# Altium PCB Stingray.pcbdoc (part 1 of 2)
Units mil, origin at the board's own origin, x right, y up, seen from the top; angles counter-clockwise.
Board outline 6200 x 5620 mil, 2 copper layers (Top Layer, Bottom Layer); 126 components, 151 nets, 467 pads, 226 vias.
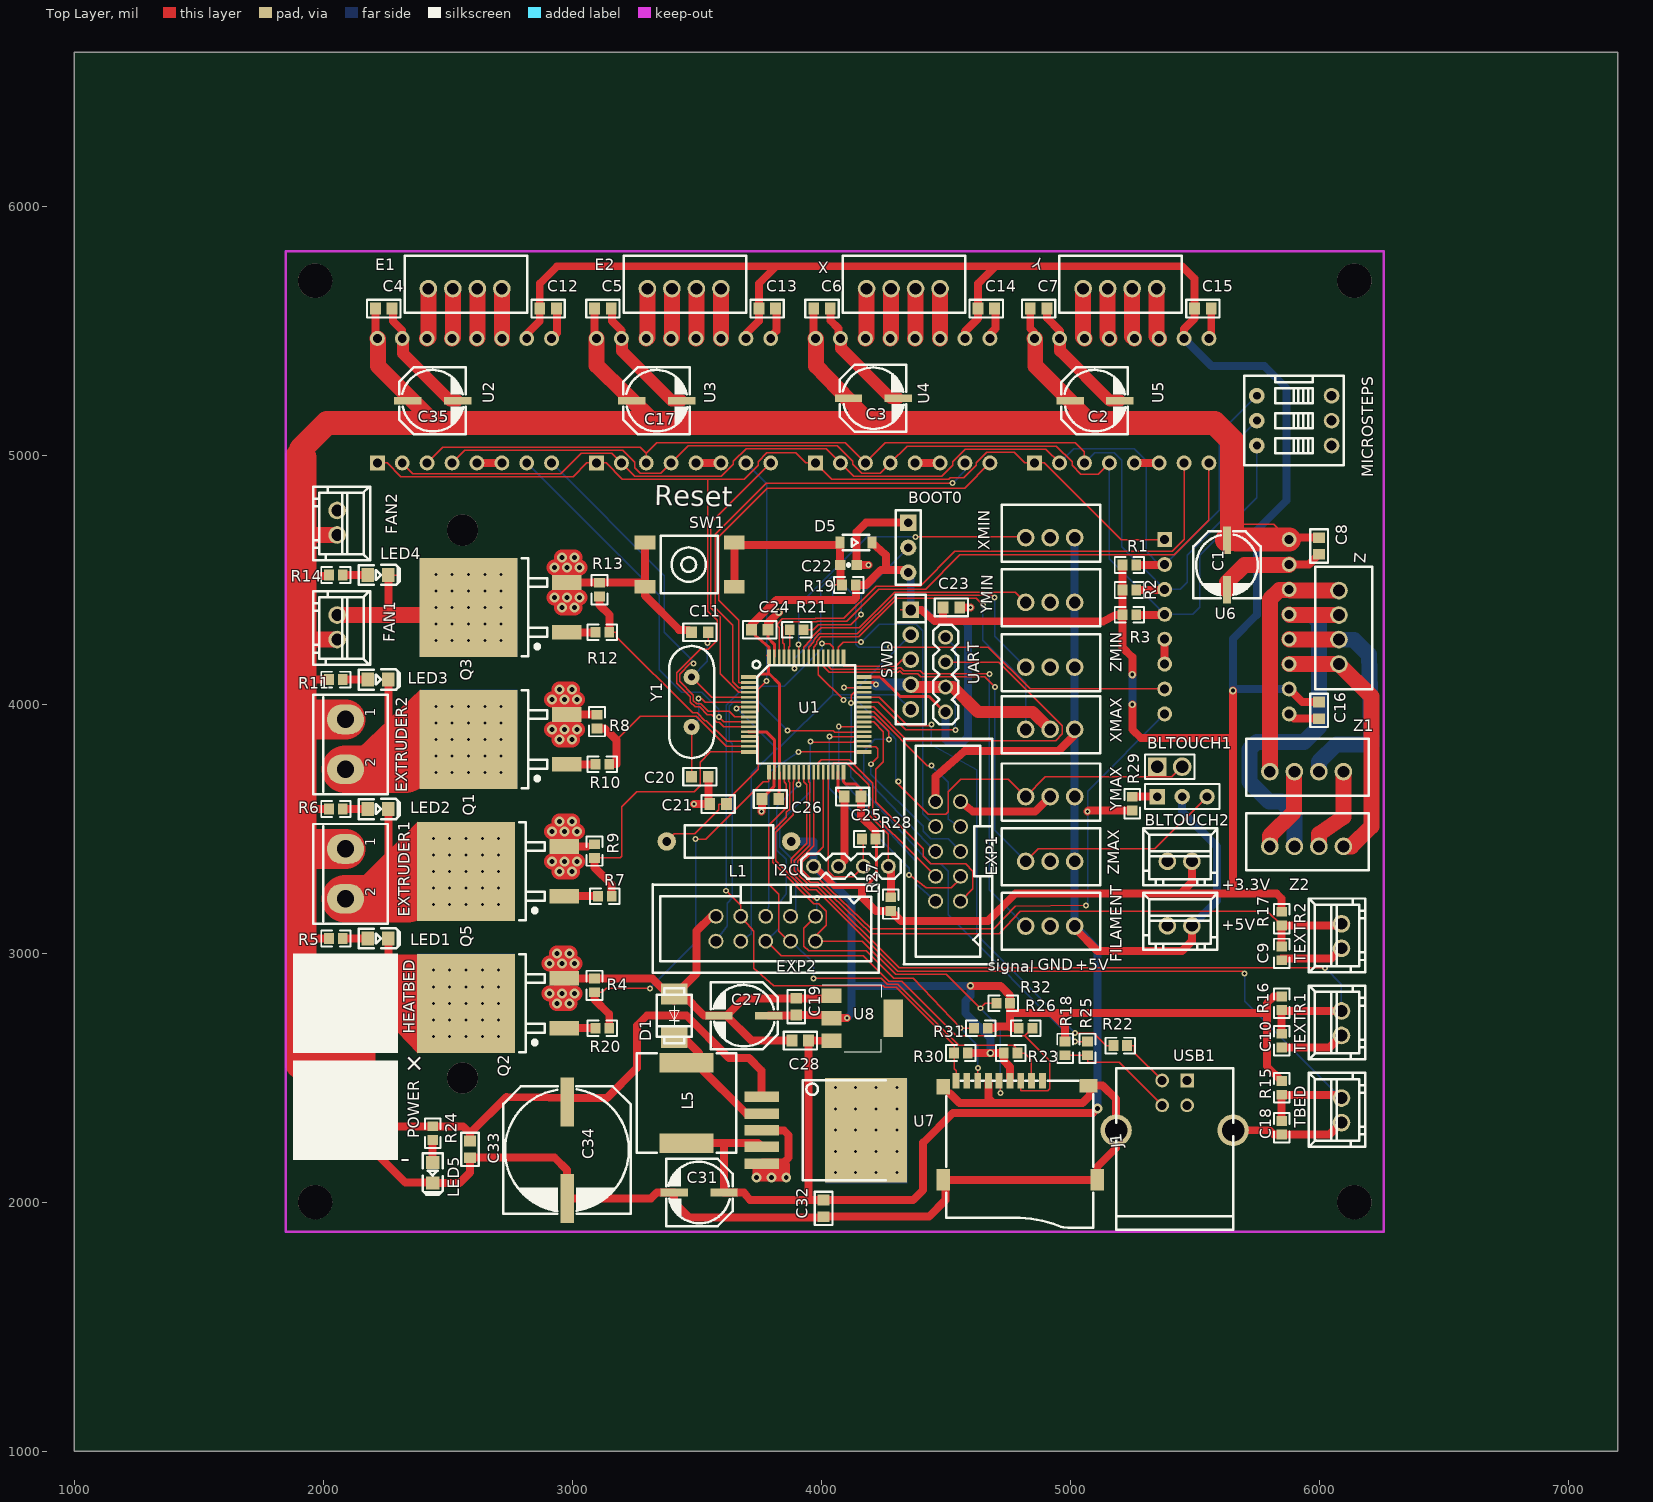
[diagram p0: Top Layer view]
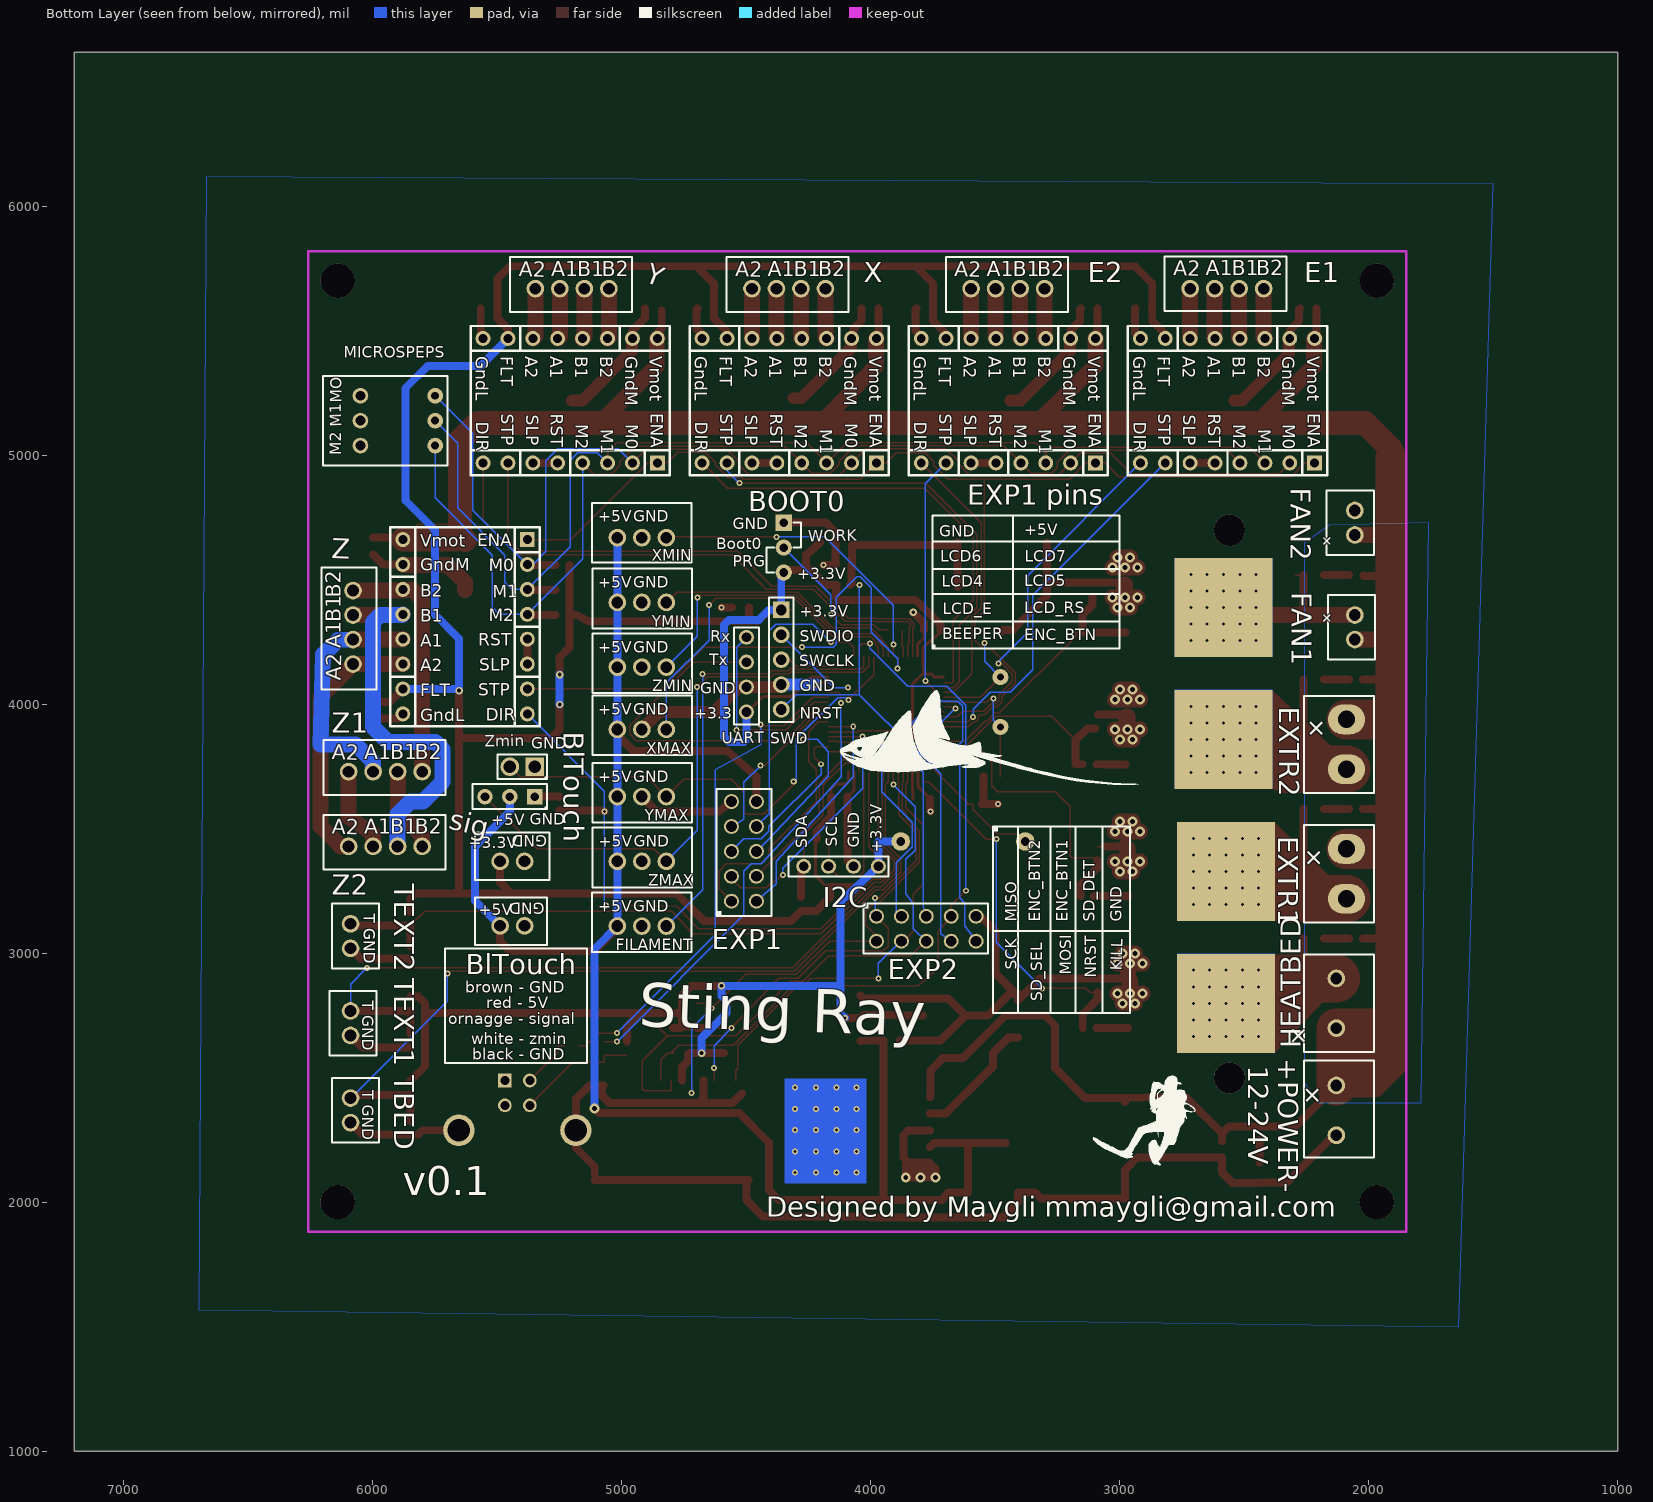
[diagram p1: Bottom Layer view, seen from below]

## Layer stack, top to bottom
Top Layer: signal copper (thickness not stored)
Dielectric: dielectric 12.6, FR-4, Dk 4.8
Bottom Layer: signal copper (thickness not stored)

## Board outline
7200,1000 1000,1000 1000,6620 7200,6620

## Components (designator, comment, footprint, x,y, rotation, side; value= is the part's Value field where it differs from the comment)
+3.3V "XH-2A black RHOS" XH-2A 5440,3370 r0 top
+5V "XH-2A black RHOS" XH-2A 5440,3111 r0 top
BLTOUCH1 "Header-Male-2.54_1x3" HDR-3X1/2.54 5450,3630 r0 top
BLTOUCH2 "Header-Male-2.54_1x2" HDR-2X1/2.54 5400,3750 r90 top
BOOT0 "BOOT0" H3-2.54 4350,4630 r0 top
C1 "100uF" CAP-D6.3XH7.7 5630,4560 r90 top
C2 "100uF" CAP-D6.3XH7.7 5100,5220 r180 top
C3 "100uF" CAP-D6.3XH7.7 4210,5230 r180 top
C4 "100nF" C0603#1 2210,5590 r0 top
C5 "100nF" C0603#1 3090,5590 r0 top
C6 "100nF" C0603#1 3970,5590 r0 top
C7 "100nF" C0603#1 4840,5590 r0 top
C8 "100nF" C0603#1 6000,4670 r270 top
C9 "10uF" 0603#1 5850,3000 r90 top
C10 "10uF" 0603#1 5850,2650 r90 top
C11 "22pF" C0603#1 3546.9,4290 r180 top
C12 "100nF" C0603#1 2870,5590 r0 top
C13 "100nF" C0603#1 3750,5590 r0 top
C14 "100nF" C0603#1 4630,5590 r0 top
C15 "100nF" C0603#1 5500,5590 r0 top
C16 "100nF" C0603#1 6000,4010 r270 top
C17 "100uF" CAP-D6.3XH7.7 3340,5220 r180 top
C18 "10uF" 0603#1 5850,2300 r90 top
C19 "100nF" C0603#1 3900,2820 r270 top
C20 "22pF" C0603#1 3480,3710 r0 top
C21 "100nF" C0603#1 3620,3600 r180 top
C22 "10UF-6.3V-20%(0603)" 0603-CAP 4110,4560 r180 top
C23 "100nF" C0603#1 4490,4390 r0 top
C24 "100nF" C0603#1 3720,4300 r0 top
C25 "100nF" C0603#2 4160,3630 r180 top
C26 "100nF" C0603#2 3830,3620 r180 top
C27 "100uF" CAP-D6.3XH5.5 3690,2750 r0 top
C28 "100nF" C0603#1 3950,2650 r180 top
C31 "220uF" CAP-D6.3XH5.5 3510,2040 r0 top
C32 "100nF" C0603#1 4010,2010 r270 top
C33 "100nF" C0603#2 2590,2180 r90 top
C34 "470uF" CAP-D12.5XH13.5 2980,2210 r90 top
C35 "100uF" CAP-D6.3XH7.7 2440,5220 r180 top
D1 "SS54" SMB(DO-214AA) 3410,2750 r270 top
D5 "1N4148W" SOD-123 4140,4650 r180 top
E1 "XH-4AK M" XH-4A 2570,5670 r0 top
E2 "XH-4AK M" XH-4A 3450,5670 r0 top
EXP1 "HDR-IDC-2.54-2X5P" HDR-IDC-2.54-2X5P 4510,3410 r90 top
EXP2 "HDR-IDC-2.54-2X5P" HDR-IDC-2.54-2X5P 3777.6,3099.3 r180 top
EXTRUDER1 "KF301-2P" KF301-2P 1960,3520 r270 top
EXTRUDER2 "KF301-2P" KF301-2P 1960,4040 r270 top
FAN1 "XH-2A black RHOS" XH-2A 2056.35,4310 r270 top
FAN2 "XH-2A black RHOS" XH-2A 2056.35,4730 r270 top
FILAMENT "XH-3A" XH-3A 4920,3110 r0 top
HEATBED "KF129-5.08" KF129-5.08 2300,2600 r180 top
I2C "Header-Male-2.54_1x4" 210S-1X4P 4120,3350 r0 top
J1 "Micro SD Card Holder;" MICRO-SD9+4P-SMD-16.1X14.5X1.85MM 4800,2290 r270 top
L1 "100uH" AXIAL-0.5 3630,3450 r180 top
L5 "47uH" SMD-10.0X10.0-10A50 3460,2400 r270 top
LED1 "Hotbead" LED-0805 2220,3060 r180 top
LED2 "Extruder1" LED-0805 2220,3580 r180 top
LED3 "Extruder2" LED-0805 2220,4100 r180 top
LED4 "Fan" LED-0805 2220,4520 r180 top
LED5 "Power" LED-0805 2440,2120 r90 top
MICROSTEPS "DIP switch,Dip Switch,DSWB03LHGET" DSWB03LHGET 5900,5140 r270 top
POWER "KF129-5.08" KF129-5.08 2300,2170 r180 top
Q1 "IRL3803S" TO-263-2-COLD 2983,3765 r90 top
Q2 "IRL3803S" TO-263-2-COLD 2973,2705 r90 top
Q3 "IRL3803S" TO-263-2-COLD 2983,4295 r90 top
Q5 "IRL3803S" TO-263-2-COLD 2973,3235 r90 top
R1 "10KΩ" 0603#2 5270,4560 r180 top
R2 "10KΩ" 0603#2 5270,4460 r180 top
R3 "10KΩ" 0603#2 5270,4360 r180 top
R4 "100K" 0603#2 3090,2840 r90 top
R5 "3.3K" 0603#2 2020,3060 r0 top
R6 "3.3K" 0603#2 2020,3580 r0 top
R7 "10" 0603#2 3100,3230 r0 top
R8 "100K" 0603#2 3100,3900 r90 top
R9 "100K" 0603#2 3090,3380 r90 top
R10 "10" 0603#2 3090,3760 r0 top
R11 "3.3K" 0603#2 2020,4100 r0 top
R12 "10" 0603#2 3090,4290 r0 top
R13 "100K" 0603#2 3110,4430 r90 top
R14 "3.3K" 0603#2 2020,4520 r0 top
R15 "3KΩ" 0603#1 5850,2460 r90 top
R16 "3KΩ" 0603#1 5850,2800 r90 top
R17 "3KΩ" 0603#1 5850,3140 r90 top
R18 "22" 0603#2 5070,2650 r270 top
R19 "10KΩ" 0603#2 4080,4480 r0 top
R20 "10" 0603#2 3090,2700 r0 top
R21 "10KΩ" 0603#2 3870,4300 r0 top
R22 "22" 0603#2 5170,2630 r0 top
R23 "47K" 0603#2 4730,2600 r0 top
R24 "3.3K" 0603#2 2440,2310 r270 top
R25 "1.5K" 0603#2 4980,2650 r270 top
R26 "47K" 0603#2 4790,2700 r0 top
R27 "4.7K" 0603#2 4280,3230 r270 top
R28 "4.7K" 0603#2 4160,3460 r0 top
R29 "10KΩ" 0603#2 5250,3570 r90 top
R30 "47K" 0603#2 4530,2600 r0 top
R31 "47K" 0603#2 4610,2700 r0 top
R32 "47K" 0603#2 4700,2800 r0 top
SW1 "Up" KEY-6.0*6.0 3470,4560 r0 top
SWD "Header-Male-2.54_1x5" DIP-1X5P-2.54MM-M 4360,4180 r270 top
TBED "XH-2A black RHOS" XH-2A 6090,2370 r90 top
TEXTR1 "XH-2A black RHOS" XH-2A 6090,2720 r90 top
TEXTR2 "XH-2A black RHOS" XH-2A 6090,3070 r90 top
U1 "STM32F103RCT6" LQFP64-0.5-10X10MM 3940,3960 r0 top
U2 "DRV8825" DRV8825 2220,4970 r90 top
U3 "DRV8825" DRV8825 3100,4970 r90 top
U4 "DRV8825" DRV8825 3980,4970 r90 top
U5 "DRV8825" DRV8825 4860,4970 r90 top
U6 "DRV8825" DRV8825 5380,4660 r0 top
U7 "LM2596R-5.0" TO-263-5-COLD 3780,2289.9 r180 top
U8 "AMS1117-3.3" SOT-223 4290,2740 r0 top
UART "Header-Male-2.54_1x4" 210S-1X4P 4500,4120 r90 top
USB1 "USB-B-Female-TH_C46393" USB-M-49 5420,2390 r0 top
X "XH-4AK M" XH-4A 4330,5670 r0 top
XMAX "XH-3A" XH-3A 4920,3900 r0 top
XMIN "XH-3A" XH-3A 4920,4670 r0 top
Y "XH-4AK M" XH-4A 5200,5670 r0 top
Y1 "49S8M" HC49US 3480,4010 r90 top
YMAX "XH-3A" XH-3A 4920,3630 r0 top
YMIN "XH-3A" XH-3A 4920,4410 r0 top
Z "XH-4AK M" XH-4A 6080,4310 r270 top
Z1 "XH-4AK M" XH-4A 5950,3730 r0 top
Z2 "XH-4AK M" XH-4A 5950,3430 r0 top
ZMAX "XH-3A" XH-3A 4920,3370 r0 top
ZMIN "XH-3A" XH-3A 4920,4150 r0 top
? "" IMAGE 2902.24,2329.31 r0 top
? "" IMAGE 3524.2,3867.23 r0 top

## Footprints (in the part's own frame and the unit in brackets; to place one, negate y for a bottom-side part, rotate by r counter-clockwise, add the part's x,y. Pads: shape width x height; smd on the part's side, far side on the other; paste and mask are expansions set on the pad)
210S-1X4P [mil]
  round 60 hole 39.37: 1(-150,0) 2(-50,0) 3(50,0) 4(150,0)
  silkscreen extent -200,-50 200,50
0603#1 [mm]
  rect 1x1.1 smd: 1(-0.7,0) 2(0.7,0)
  silkscreen extent -1.5,-0.8 1.5,0.8
0603#2 [mm]
  rect 1x1.1 smd: 1(0.1,0) 2(1.5,0)
  silkscreen extent -0.7,-0.8 2.3,0.8
0603-CAP [mil]
  rect 43.3x39.4 smd: 1(-32.95,0) 2(33.05,0)
  silkscreen extent 0,-1 0,1
AXIAL-0.5 [mil]
  round 74 hole 35.4: 1(-250,0) 2(250,0)
  silkscreen extent -177,-65 177,65
C0603#1 [mil]
  rect 43.3x47.2 smd: 1(0.05,0) 2(66.95,0)
  silkscreen extent -34,-35 100,35
C0603#2 [mil]
  rect 43.3x47.2 smd: 1(-0.05,0) 2(66.85,0)
  silkscreen extent -34,-35 100,35
CAP-D6.3XH5.5 [mm]
  rect 2.8x0.8 smd: 1(2.54,0) 2(-2.54,0)
  silkscreen extent -3.37,-3.43 3.43,3.43
CAP-D6.3XH7.7 [mm]
  rect 2.8x0.8 smd: 1(2.54,0) 2(-2.54,0)
  silkscreen extent -3.37,-3.43 3.43,3.43
CAP-D12.5XH13.5 [mm]
  rect 5x1.4 smd: 1(4.928,0) 2(-4.928,0)
  silkscreen extent -6.5,-6.5 6.5,6.5
DIP-1X5P-2.54MM-M [mm]
  rect 1.7x1.7 hole 1.1: 1(-5.08,0)
  round 1.7 hole 1.1: 2(-2.54,0) 3(0,0) 4(2.54,0) 5(5.08,0)
  silkscreen extent -6.6,-1.52 6.6,1.52
DRV8825 [mil]
  rect 60x60 hole 36: 1(0.1,2.2)
  round 60 hole 36: 2(0.08,-97.76) 3(0.08,-197.76) 4(0.08,-297.76) 5(0.08,-397.76) 6(0.08,-497.76) 7(0.08,-597.76) 8(0.08,-697.76) 9(500.08,-697.76) 10(500.08,-597.76) 11(500.08,-497.76) 12(500.08,-397.76) 13(500.08,-297.76) 14(500.08,-197.76) 15(500.08,-97.76) 16(500.08,2.24)
DSWB03LHGET [mm]
  round 1.6 hole 1: 1(-2.54,3.81) 2(0,3.81) 3(2.54,3.81)
  round 1.6 hole 0.813: 4(2.54,-3.81) 5(0,-3.81) 6(-2.54,-3.81)
  silkscreen extent -4.56,-5.11 4.57,5.05
H3-2.54 [mil]
  rect 65x65 hole 35: 1(0,100)
  round 65 hole 35: 2(0,0) 3(0,-100)
  silkscreen extent -50,-150 50,150
HC49US [mil]
  round 65 hole 27.6: 1(-100,0) 2(100,0)
  silkscreen extent -225,-90 225,90
HDR-2X1/2.54 [mm]
  rect 1.9x1.9 hole 1.3: 1(0,1.27)
  round 1.9 hole 1.3: 2(0,-1.27)
  silkscreen extent -1.27,-2.54 1.27,2.54
HDR-3X1/2.54 [mil]
  rect 62x62 hole 35: 1(-100,0)
  round 62 hole 35: 2(0,0) 3(100,0)
  silkscreen extent -150,-50 150,50
HDR-IDC-2.54-2X5P [mil]
  round 60 hole 43.3: 1(-200,-50) 2(-200,50) 3(-100,-50) 4(-100,50) 5(0,-50) 6(0,50) 7(100,-50) 8(100,50) 9(200,-50) 10(200,50)
  silkscreen extent -453,-178 453,177
IMAGE [mil]
KEY-6.0*6.0 [mm]
  rect 2.1x1.4 smd: 1(4.601,-2.201) 2(-4.502,-2.201) 3(4.604,2.303) 4(-4.502,2.301)
  silkscreen extent -2.9,-2.9 2.9,3
KF129-5.08 [mm]
  round 1.8 hole 1.2: 1(4.3,-2.54) 2(4.3,-7.62)
  silkscreen extent 0,-10.16 10.67,0
KF301-2P [mil]
  oval 120x150 hole 70: 1(100,130) 2(300,130)
  silkscreen extent 0,0 400,300
LED-0805 [mil]
  rect 51.2x55.1 smd: 1(40.7,0.05) 2(-42,0.05)
  silkscreen extent -88,-41 78,40
LQFP64-0.5-10X10MM [mil]
  rect 59.1x15.7 smd: 1(-231.95,149.95) 16(-231.95,-150.05) 33(232.05,-150.05) 48(232.05,149.95)
  rect 59.1x11 smd: 2(-231.95,128) 3(-231.95,108) 4(-231.95,89) 5(-231.95,69) 6(-231.95,49) 7(-231.95,30) 8(-231.95,10) 9(-231.95,-10) 10(-231.95,-30) 11(-231.95,-49) 12(-231.95,-69) 13(-231.95,-89) 14(-231.95,-108) 15(-231.95,-128) 34(232.05,-128) 35(232.05,-108) 36(232.05,-89) 37(232.05,-69) 38(232.05,-49) 39(232.05,-30) 40(232.05,-10) 41(232.05,10) 42(232.05,30) 43(232.05,49) 44(232.05,69) 45(232.05,89) 46(232.05,108) 47(232.05,128)
  rect 15.7x59.1 smd: 17(-149.95,-232.05) 32(150.05,-232.05) 49(150.05,231.95) 64(-149.95,231.95)
  rect 11x59.1 smd: 18(-128,-232.05) 19(-108,-232.05) 20(-89,-232.05) 21(-69,-232.05) 22(-49,-232.05) 23(-30,-232.05) 24(-10,-232.05) 25(10,-232.05) 26(30,-232.05) 27(49,-232.05) 28(69,-232.05) 29(89,-232.05) 30(108,-232.05) 31(128,-232.05) 50(128,231.95) 51(108,231.95) 52(89,231.95) 53(69,231.95) 54(49,231.95) 55(30,231.95) 56(10,231.95) 57(-10,231.95) 58(-30,231.95) 59(-49,231.95) 60(-69,231.95) 61(-89,231.95) 62(-108,231.95) 63(-128,231.95)
  silkscreen extent -215,-197 197,215
MICRO-SD9+4P-SMD-16.1X14.5X1.85MM [mil]
  rect 63x27.6 smd: 1(-199,89) 2(-199,45) 3(-199,2) 4(-199,-41) 5(-199,-85) 6(-199,-128) 7(-199,-171) 8(-199,-215) 9(-199,-258)
  rect 63x55.1 smd: G1(-175,-308.95)
  rect 86.6x55.1 smd: G2(199,-308.95) G3(199,309.05)
  rect 55.1x70.9 smd: G4(-178.95,274.05)
  silkscreen extent -199,-298 392,293
SMB(DO-214AA) [mil]
  rect 85x108 smd: 1(-87,0) 2(87,0)
  silkscreen extent -110,-70 110,70
SMD-10.0X10.0-10A50 [mm]
  rect 2x5.5 smd: 1(-4.1,0) 2(4.1,0)
  silkscreen extent -5.08,-5.08 5.08,5.08
SOD-123 [mil]
  rect 35.8x48 smd: 1(64,0) 2(-64,0)
  silkscreen extent -53,-31 53,31
SOT-223 [mm]
  rect 2x1.5 smd: 1(-6.3,2.3) 2(-6.3,0) 3(-6.3,-2.3)
  rect 2x3.8 smd: 4(0,0)
  silkscreen extent -7.25,-3.41 -1.24,3.41
TO-263-2-COLD [mm]
  rect 1.5x3 smd: 1(-0.127,0.127) 3(4.953,0.127)
  rect 10.1x10 smd: 4(2.413,10.126)
  rect 10.1x10 smd far side: 4(2.413,10.126)
  silkscreen extent -2.59,2.13 7.41,4.73
TO-263-5-COLD [mil]
  rect 137.79x42.1 smd: 1(18,-134) 2(18,-67) 3(18,0) 4(18,67) 5(18,134)
  rect 329.92x419.68 smd: 3(-400,0)
  silkscreen extent -480,-200 -147,200
USB-M-49 [mm]
  round 3.2 hole 2.3: 0(-5.969,-2.54) 0(5.969,-2.54)
  rect 1.4x1.4 hole 0.92: 1(1.27,2.54)
  round 1.4 hole 0.92: 2(-1.27,2.54) 3(-1.27,0) 4(1.27,0)
  silkscreen extent -5.97,-12.7 5.97,3.81
XH-2A [mm]
  round 1.8 hole 1.199: 1(-1.251,0) 2(1.251,0)
  silkscreen extent -3.69,-2.45 3.83,3.35
XH-3A [mm]
  round 1.8 hole 1.199: 1(-2.501,0) 2(0.001,0) 3(2.501,0)
  silkscreen extent -4.91,-2.44 5.1,3.38
XH-4A [mm]
  round 1.8 hole 1.199: 1(-3.75,0) 2(-1.248,0) 3(1.251,0) 4(3.75,0)
  silkscreen extent -6.16,-2.44 6.33,3.38

## Free pads (board coordinates)
  round 137.8 hole 137.8 unplated: ""(1968.11,2001.11) ""(1968.11,5701.89) ""(6141.33,2001.11) ""(6141.33,5701.89)
  round 125.98 hole 125.98 unplated: ""(2560,2500) ""(2560,4700)

## Via types
v1: diameter 24.4, hole 12, Top Layer to Bottom Layer, 126 vias
v2: diameter 24, hole 12, Top Layer to Bottom Layer, 50 vias
v3: diameter 40, hole 20, Top Layer to Bottom Layer, 44 vias
v4: diameter 30, hole 15, Top Layer to Bottom Layer, 6 vias

## Nets (pads, with @x,y where several pads share a name; then routed paths per layer and width w, separated by ;. In a path a pad name is that pad's centre, name@x,y a point inside that pad or via, vN(x,y) a via of type N, cw(c..) or ccw(c..) an arc to the next point about the centre after c; other vN are vias at no path point)
3: 
  other v1: 4057,2119.9 4137.33,2119.9 4220.67,2119.9 4304,2119.9 4057,2205.15 4137.33,2205.15 4220.67,2205.15 4304,2205.15 4057,2290.4 4137.33,2290.4 4220.67,2290.4 4304,2290.4 4057,2375.65 4137.33,2375.65 4220.67,2375.65 4304,2375.65 4057,2460.9 4137.33,2460.9 4220.67,2460.9 4304,2460.9
+5V: +5V.2 BLTOUCH1.2 C28.1 C31.1 C32.1 EXP1.10 FILAMENT.3 L5.2 U7.4 U8.3 XMAX.3 XMIN.3 YMAX.3 YMIN.3 ZMAX.3 ZMIN.3 | length 7339.4
  Top Layer w6: C31.1@3610,2040 3642.1,2040 C31.1@3642.1,2050 ; C28.1@3949.95,2650 C28.1@3965.3,2650
  Top Layer w32: L5.2@3460,2238.58 3746.32,2238.58 U7.4@3762,2222.9 ; 3609.3,2220 3609.3,2040.7 C31.1@3610,2040 3690,2040 ; 3691,2038 3714.3,2009.9 4010,2009.9 4370,2009.9 4410,2050 4410,2240 4530,2360 5092.4,2360 v3(5109.5,2377.1) ; C28.1@3949.95,2650 3950,2012.7 3952.7,2009.9 ; C28.1@3965.3,2650 3980.7,2650 ; 3980,2650 U8.3@4041.3,2649.4 ; EXP1.10@4460,3610 4460,3710 4576.1,3813 4953,3813 5029.3,3889.2 XMAX.3@5018.5,3900 ; FILAMENT.3@5018.5,3110 5018.5,3101.5 5110,3010 5450,3010 5490,3050 5490,3110.2 +5V.2@5489.3,3111
  Bottom Layer w32: XMIN.3@5018.5,4670 5018.5,4410 5018.5,4150 5018.5,3900 5018.5,3630 5018.5,3370 5018.5,3110 5109.5,3018.9 v3(5109.5,2377.1) ; BLTOUCH1.2@5450,3630 5450,3570 5590,3430 5590,3211.7 +5V.2@5489.3,3111
BEEPER: EXP1.1 U1.39 | length 1051.4
  Top Layer w6: U1.39@4172.1,3930 4210.7,3930 4250,3890 4250,3770 4220,3740 4220,3610 4410,3420 4410,3390 4440,3360 4580,3360 4610,3330 4610,3260 EXP1.1@4560,3210
BTN_EN1: EXP2.5 U1.33 | length 988
  Top Layer w6: v2(3910,3810) 3910,3809.9 U1.33@4172.1,3809.9
  Bottom Layer w6: EXP2.5@3777.6,3149.3 3790,3190 3790,3727.9 v2(3910,3810)
BTN_EN2: EXP2.3 U1.35 | length 999
  Top Layer w6: v2(3957.3,3852) 3961.4,3847.9 4129.3,3847.9 4133.4,3852 U1.35@4172.1,3852
  Bottom Layer w6: EXP2.3@3898.8,3149.3 3898.8,3364.2 3833.8,3429.1 3833.8,3526.9 3957.3,3650.4 v2(3957.3,3852)
BTN_ENC: EXP1.2 U1.38 | length 958.5
  Top Layer w6: v2(4070.9,3911) 4133.4,3911 U1.38@4172.1,3911
  Bottom Layer w6: v2(4070.9,3911) 4070.9,3709.1 4380,3370.9 4380,3280 EXP1.2@4460,3210
E1_DIR: U1.9 U2.8 | length 1493.2
  Top Layer w6: v2(3488.1,4165.3) 3474.8,4165.3 3431.8,4122.3 3431.8,4093.2 3487.3,4037.7 3487.3,4014.9 3499.6,4002.5 3516.9,4002.5 3547.1,3972.4 3630.6,3972.4 3653,3950 U1.9@3708.1,3950
  Bottom Layer w6: U2.8@2917.76,4970.08 3370,4517.8 3370,4290 3488.1,4171.9 v2(3488.1,4165.3)
E1_STP: U1.10 U2.7 | length 1514.1
  Top Layer w6: v2(3589,3949.3) 3608.4,3930 U1.10@3708.1,3930
  Bottom Layer w6: U2.7@2817.76,4970.08 3350,4437.8 3350,4140 3440,4050 3520,4050 3589,3981 v2(3589,3949.3)
E2_DIR: U1.4 U3.8 | length 1105.6
  Top Layer w6: U1.4@3708.1,4049 3669.4,4049 3595.7,4122.7 3595.7,4350 3557.6,4388.1 3557.6,4729.9 U3.8@3797.76,4970.08
E2_STP: U1.8 U3.7 | length 1087.4
  Top Layer w6: U1.8@3708.1,3970 3746.7,3970 3746.7,4060.7 v2(3781,4095)
  Bottom Layer w6: U3.7@3697.76,4970.08 3781,4886.9 v2(3781,4095)
EXTRUDER1: R7.2 R9.1 U1.16 | length 1139.9
  Top Layer w6: 3090,3345.2 3090,3359.6 ; R9.1@3090,3383.9 3194,3383.9 3200,3390 3200,3590 3260,3650 3490,3650 3514,3674 3514,3769 3555,3809.9 U1.16@3708.1,3809.9
  Top Layer w32: 3090,3345.2 3159.1,3276.1 R7.2@3159.1,3230 ; 3090,3359.6 R9.1@3090,3373.9
EXTRUDER2: R8.1 R10.2 U1.15 | length 842.6
  Top Layer w6: 3177.8,3856.9 3273.3,3952.4 3498.4,3952.4 3618.8,3832 U1.15@3708.1,3832
  Top Layer w32: R8.1@3100,3903.9 3130.8,3903.9 3177.8,3856.9 3177.8,3760 R10.2@3149.1,3760
FAN1: R12.2 R13.1 U1.14 | length 911.3
  Top Layer w6: R12.2@3149.1,4290 3177.8,4290 3177.8,4272.9 3484.5,3966.1 3501.9,3966.1 3533.2,3934.8 3539.4,3934.8 3622.2,3852 3669.4,3852 U1.14@3708.1,3852
  Top Layer w32: R13.1@3110,4433.9 3110,4400 3150,4360 3150,4290.9 R12.2@3149.1,4290
FILAMENT: FILAMENT.1 U1.52 | length 1776.4
  Top Layer w6: U1.52@4029,4191.9 4029,4153.3 4041.4,4140.9 4304.1,4140.9 4310.2,4147 4320.2,4147 4332.5,4134.7 4399,4134.7 4411.1,4122.6 v2(4676.2,4122.6)
  Bottom Layer w6: v2(4676.2,4122.6) 4676.2,3255.3 FILAMENT.1@4821.55,3110
GND: +3.3V.1 +5V.1 BLTOUCH1.1 BLTOUCH2.1 BOOT0.1 C1.2 C2.2 C3.2 C4.2 C5.2 C6.2 C7.2 C8.2 C9.1 C10.1 C11.2 C12.2 C13.2 C14.2 C15.2 C16.2 C17.2 C18.1 C19.1 C20.2 C21.2 C22.1 C23.2 C24.2 C25.2 C26.2 C27.2 C28.2 C31.2 C32.2 C33.1 C34.2 C35.2 D1.1 EXP1.9 EXP2.9 FAN2.1 FILAMENT.2 I2C.2 J1.6 J1.G1 J1.G2 J1.G3 J1.G4 LED5.2 MICROSTEPS.1 MICROSTEPS.2 MICROSTEPS.3 POWER.1 Q1.3 Q2.3 Q3.3 Q5.3 R4.2 R8.2 R9.2 R13.2 R29.2 SW1.2 SW1.4 SWD.4 TBED.1 TEXTR1.1 TEXTR2.1 U1.12 U1.18 U1.31 U1.47 U1.63 U2.9 U2.15 U3.9 U3.15 U4.9 U4.15 U5.9 U5.15 U6.9 U6.15 U7.3 U7.5 U8.1 UART.2 USB1.0 USB1.4 XMAX.2 XMIN.2 YMAX.2 YMIN.2 ZMAX.2 ZMIN.2 | length 17177.2
  Top Layer w6: LED5.2@2439.95,2078 LED5.2@2440,2095.3 ; 2590,2149.2 C33.1@2590,2179.9 ; C12.2@2936.95,5590 C12.2@2952.3,5590 ; 3059.2,3429 3074.6,3429 3082.3,3429 R9.2@3090,3429 ; R8.2@3087.6,3959 R8.2@3100,3959.05 ; R13.2@3110,4489.05 R13.2@3120.8,4489 ; SW1.2@3292.8,4473.3 3318,4473.3 SW1.2@3330.6,4473.3 ; C31.2@3377.9,2050 3377.9,2040 C31.2@3410,2040 ; D1.1@3410,2811.2 D1.1@3410,2837 ; 3449.2,4290 C11.2@3479.95,4290 ; C21.2@3547,3600 C21.2@3553.1,3600 ; U7.5@3762,2155.9 U7.5@3801,2155.9 ; C26.2@3763.15,3620 C26.2@3771.2,3620 ; C24.2@3787,4283.6 C24.2@3786.95,4300 ; C13.2@3816.95,5590 C13.2@3832.3,5590 ; C19.1@3900,2819.9 C19.1@3907.8,2819.9 ; C25.2@4093.15,3630 C25.2@4093.2,3637.8 ; BOOT0.1@4350,4719.2 BOOT0.1@4350,4730 ; 4672,2448.4 J1.6@4672,2489 ; C7.2@4906.95,5590 C7.2@4922.3,5590 ; J1.G3@5109.1,2091 J1.G3@5109.1,2117.2 ; USB1.0@5185,2290 USB1.0@5185,2332.1
  Top Layer w12: U1.12@3708.1,3891 3709.1,3890 3780,3890 3812,3858 3812,3727.9 3810,3725.9 3810,3670 3763.2,3623.1 C26.2@3763.15,3620 ; C24.2@3787,4283.6 3787,4267.3 3812,4242.2 U1.63@3812,4191.9 ; U1.31@4068,3727.9 4068,3655.1 C25.2@4093.15,3630 ; U1.47@4172.1,4088 4212,4088 v1(4220,4080)
  Top Layer w32: POWER.1@2130.71,2270 2140,2270 2330,2080 2438,2080 LED5.2@2439.95,2078 2548,2078 2590,2120 C33.1@2590,2179.9 ; C4.2@2276.95,5590 2280,5586.9 2280,5540 2317.8,5502.2 U2.15@2317.76,5470.08 ; C33.1@2590,2179.95 2930.05,2179.95 2980,2130 C34.2@2980,2016 3316,2016 3340,2040 C31.2@3410,2040 3410,2000 3470,1940 4003.1,1940 C32.2@4010,1943.05 4433.1,1943 4500,2010 4500,2082 4491.1,2091 J1.G3@5109.1,2091 ; U2.9@2917.76,5470.08 2940,5492.3 2940,5590 C12.2@2936.95,5590 ; Q2.3@2968,2899.9 3058.3,2899.9 3059.2,2899 R4.2@3090,2899.05 3322.2,2899 D1.1@3410,2811.2 ; Q5.3@2968,3429.9 3058.3,3429.9 3059.2,3429 ; Q1.3@2978,3959.9 3068.3,3959.9 3069.2,3959 R8.2@3087.6,3959 ; Q3.3@2978,4489.9 3109.1,4489.9 R13.2@3110,4489.05 3277.1,4489 SW1.2@3292.8,4473.3 ; C5.2@3156.95,5590 3160,5586.9 3160,5540 3197.8,5502.2 U3.15@3197.76,5470.08 ; SW1.4@3292.75,4650.6 SW1.2@3292.8,4473.3 ; C11.2@3479.95,4290 3470,4300 3430,4300 3292.8,4437.2 SW1.2@3292.8,4473.3 ; v1(3490,3600) C21.2@3553.1,3600 ; C21.2@3547,3600 3547,3677.3 C20.2@3546.95,3710 ; EXP2.9@3577.6,3149.3 3560.7,3150.7 3500,3090 3500,2920 3417,2837 D1.1@3410,2837 3443,2837 3530,2750 C27.2@3590,2750 ; v1(3760,3570) 3763.2,3586.8 C26.2@3763.15,3620 ; U7.3@3762,2289.9 3850.1,2289.9 3870,2270 3870,2180 3850,2160 ; C24.2@3786.95,4300 3787,4326.9 v4(3830,4370) ; U3.9@3797.76,5470.08 3797.8,5477.8 3820,5500 3820,5586.9 C13.2@3816.95,5590 ; C28.2@3883.1,2650 3720,2650 C27.2@3620,2750 ; C6.2@4036.95,5590 4037,5543 4070,5510 4070,5477.8 U4.15@4077.76,5470.08 ; U8.1@4042,2830.5 4031.4,2819.9 3900,2819.9 C19.1@3900,2819.95 3690,2820 C27.2@3620,2750 ; I2C.2@4070,3350 4093.2,3373.2 C25.2@4093.15,3630 ; v1(4190,4560) C22.1@4142.95,4560 4143,4692.9 4180,4730 BOOT0.1@4350,4730 ; J1.G1@4518.2,2437.9 4556.1,2400 4690,2400 ; C23.2@4556.95,4390 v1(4600,4390) ; EXP1.9@4560,3610 4610,3570 4860,3570 YMAX.2@4920.1,3630 ; J1.6@4672,2489 4672,2418 4690,2400 ; U4.9@4677.76,5470.08 4677.8,5487.8 4700,5510 4700,5586.9 C14.2@4696.95,5590 ; C7.2@4906.95,5590 4907,5553 4960,5500 4960,5472.3 U5.15@4957.76,5470.08 ; J1.G3@5109.1,2117.2 5109.1,2143.4 5185,2219.3 USB1.0@5185,2290 5185,2415 5130,2470 5075.1,2470 5074.1,2468.9 5080,2463 5080,2430 5050,2400 4690,2400 ; R29.2@5250,3629.05 5251,3630 BLTOUCH1.1@5350,3630 ; U5.9@5557.76,5470.08 5567,5479.3 C15.2@5566.95,5590 ; USB1.0@5655,2290 5801.7,2290 5819.2,2272.4 C18.1@5850,2272.45 6041.7,2272.4 TBED.1@6090,2320.7 ; C10.1@5850,2622.45 6041.7,2622.4 TEXTR1.1@6090,2670.7 ; C9.1@5850,2972.45 5850,2980 6049.3,2980 TEXTR2.1@6090,3020.7 ; U6.9@5880.08,3962.24 5899.3,3943 5925.9,3943 C16.2@6000,3943.05 ; U6.15@5880.08,4562.24 5959.2,4562.2 C8.2@6000,4603.05 ; C27.2@3590,2750 C27.2@3620,2750 ; C27.2@3590,2750 C27.2@3620,2750 ; 3850,2160 3766.1,2160 U7.5@3762,2155.9 3740,2133.9 v3(3740,2100) v3(3800,2100) v3(3860,2100) 3860,2150 3850,2160
  Top Layer w48: U2.15@2317.76,5470.08 2320,5467.8 2320,5410 2510,5220 C35.2@2540,5220 ; U3.15@3197.76,5470.08 3200,5467.8 3200,5420 3400,5220 C17.2@3440,5220 ; U4.15@4077.76,5470.08 4080,5467.8 4080,5430 4280,5230 C3.2@4310,5230 ; SWD.4@4360,4080 4370,4070 UART.2@4500,4070 4530,4070 4630,3970 4850.1,3970 XMAX.2@4920.1,3900 ; U5.15@4957.76,5470.08 4960,5467.8 4960,5420 5160,5220 C2.2@5200,5220
  Top Layer w64: v3(2910,2840) v3(2960,2840) ; v3(2910,2960) v3(2960,2960) ; v3(2920,3370) v3(2970,3370) ; v3(2920,3490) v3(2970,3490) v3(3020,3490) ; v3(2920,3900) v3(2970,3900) ; v3(2920,4020) v3(2970,4020) v3(3020,4020) ; v3(2930,4430) v3(2980,4430) ; v3(2930,4550) v3(2980,4550) v3(3030,4550) ; v3(2940,2800) v3(2990,2800) ; v3(2940,3000) v3(2990,3000) ; v3(2950,3330) v3(3000,3330) ; v3(2950,3530) v3(3000,3530) ; v3(2950,3860) v3(3000,3860) ; v3(2950,4060) v3(3000,4060) ; v3(2960,4390) v3(3010,4390) ; v3(2960,4590) v3(3010,4590) ; Q5.3@2978,3429.9 2970,3422 v3(2970,3370) ; Q1.3@2978,3949.9 2970,3952 v3(2970,3900) ; Q3.3@2988,4479.9 2980,4482 v3(2980,4430) ; v3(3010,2840) v3(2960,2840) ; v3(3010,2960) v3(2960,2960) ; v3(3020,3370) v3(2970,3370) ; v3(3020,3900) v3(2970,3900) ; v3(3030,4430) v3(2980,4430) ; C1.2@5630,4460 5630,4490 5700,4560 5877.8,4560 U6.15@5880.08,4562.24 ; v3(2960,2840) 2960,2892 2968,2899.9 2968,2952 v3(2960,2960)
  Bottom Layer w48: v1(4220,4080) SWD.4@4360,4080
HEATBED: R4.1 R20.2 U1.17 | length 1500.3
  Top Layer w6: R4.1@3090,2843.9 3120.8,2843.9 3136.6,2859.7 v2(3311.9,2859.7) ; v2(3496.4,3459.1) 3537.3,3459.1 3767.6,3689.3 3790.1,3689.3 U1.17@3790.1,3727.9
  Top Layer w32: R4.1@3090,2843.9 3090,2815.2 3149.1,2756.1 R20.2@3149.1,2700
  Bottom Layer w6: v2(3311.9,2859.7) 3496.4,3044.2 v2(3496.4,3459.1)
J1_1: J1.1
J1_8: J1.8
KILL: EXP2.10 U1.37 | length 1573.6
  Top Layer w6: v2(3865.4,3894.9) 4048.2,3894.9 4054,3889.1 4131.5,3889.1 4133.4,3891 U1.37@4172.1,3891
  Bottom Layer w6: EXP2.10@3577.6,3049.3 3622.1,3111 3622.1,3202.1 3643.4,3223.5 3643.4,3841.3 3630.9,3853.9 3630.9,3992.2 3652.1,4013.5 3746.9,4013.5 v2(3865.4,3894.9)
L1_2: C21.1 L1.2 U1.13 | length 683.3
  Top Layer w6: L1.2@3380,3450 3410.2,3480.2 3492.5,3480.2 3589.2,3576.9 3589.2,3600 3604.6,3600 C21.1@3606.7,3600 ; C21.1@3619.95,3600 C21.1@3606.7,3600 ; U1.13@3708.1,3871 3746.7,3871 3746.7,3740 C21.1@3606.7,3600
LCD4: EXP1.5 U1.34 | length 673.2
  Top Layer w6: U1.34@4172.1,3832 4174.1,3830 4220,3830 4227.3,3822.7 4227.3,3787.3 v2(4200,3760)
  Bottom Layer w6: v2(4200,3760) 4200,3720 4410,3510 4410,3490 4440,3460 4510,3460 EXP1.5@4560,3410
LCD5: EXP1.6 U1.40 | length 795.5
  Top Layer w6: U1.40@4172.1,3950 4213.5,3950 4271.8,3891.7 v2(4271.8,3859.9)
  Bottom Layer w6: v2(4271.8,3859.9) 4214.7,3860.4 4172.1,3810 4172.1,3711.6 4458.9,3409 EXP1.6@4460,3410
LCD6: EXP1.7 U1.41 | length 662.3
  Top Layer w6: U1.41@4172.1,3970 4210.7,3970 4426.2,3754.5 v2(4442.5,3754.5)
  Bottom Layer w6: v2(4442.5,3754.5) 4510,3687 4510,3600 4510,3540 4556.7,3508.3 EXP1.7@4560,3510
LCD7: EXP1.8 U1.50 | length 1235.9
  Top Layer w6: U1.50@4068,4191.9 4068,4230.6 4088.1,4250.7 v2(4160.7,4250.7)
  Bottom Layer w6: v2(4160.7,4250.7) 4232.6,4322.6 4382.2,4322.6 4408.1,4296.7 4408.1,3651.2 4408,3562 EXP1.8@4460,3510
LCD_E: EXP1.3 U1.36 | length 1066
  Top Layer w6: v2(4033.4,3871) U1.36@4172.1,3871 ; v2(4353.5,3315.7) 4421.6,3263.4 4523.4,3263.4 EXP1.3@4560,3300
  Bottom Layer w6: v2(4033.4,3871) 4033.4,3662.6 4353.5,3342.5 v2(4353.5,3315.7)
LCD_RS: EXP1.4 U1.27 | length 780.6
  Top Layer w6: U1.27@3989,3727.9 3989,3766.6 4001.3,3778.9 4112.1,3778.9 4207.7,3683.3 4207.7,3560.1 4320,3450 EXP1.4@4460,3310
LED1_1: LED1.1 R5.2 | length 100.3
  Top Layer w32: R5.2@2079.1,3060 2144.6,3060 2144.6,3059.9 LED1.1@2179.3,3059.9
LED1_2: HEATBED.2 LED1.2 Q2.4 | length 648.4
  Top Layer w32: LED1.2@2262,3059.9 2262,2908.3 2270.3,2900
  Top Layer w192: HEATBED.2@2130.71,2900 2474.2,2900 Q2.4@2574.3,2799.9
LED2_1: LED2.1 R6.2 | length 100.3
  Top Layer w32: R6.2@2079.1,3580 2144.6,3580 2144.6,3579.9 LED2.1@2179.3,3579.9
LED2_2: EXTRUDER1.2 LED2.2 Q5.4 | length 901
  Top Layer w32: LED2.2@2262,3579.9 2262,3298 2340,3220
  Top Layer w192: EXTRUDER1.2@2090,3220 2340,3220 Q5.4@2574.3,3329.9
LED3_1: LED3.1 R11.2 | length 100.3
  Top Layer w32: R11.2@2079.1,4100 2144.6,4100 2144.6,4099.9 LED3.1@2179.3,4099.9
LED3_2: EXTRUDER2.2 LED3.2 Q1.4 | length 885.2
  Top Layer w32: LED3.2@2262,4099.9 2262,3750.1 2272.1,3740
  Top Layer w192: EXTRUDER2.2@2090,3740 2330,3740 Q1.4@2584.3,3859.9
LED4_1: LED4.1 R14.2 | length 100.3
  Top Layer w32: R14.2@2079.1,4520 2144.6,4520 2144.6,4519.9 LED4.1@2179.3,4519.9
LED4_2: FAN1.1 LED4.2 Q3.4 | length 736
  Top Layer w6: LED4.2@2262,4519.9 2296.7,4519.9
  Top Layer w32: 2262,4359.2 2262,4359.3 LED4.2@2262,4519.9
  Top Layer w64: FAN1.1@2056.35,4359.25 2553.6,4359.2 Q3.4@2584.3,4389.9
LED5_1: LED5.1 R24.2 | length 90.2
  Top Layer w32: LED5.1@2439.95,2160.7 2440,2222.1 2440,2222.2 R24.2@2440,2250.9
MOT_EN: U1.11 U2.1 U3.1 U4.1 U5.1 U6.1 | length 4828.9
  Top Layer w6: U2.1@2217.8,4970.1 2256.9,4970.1 2311.8,4915.2 3003.8,4915.2 3058.7,4970.1 U3.1@3097.8,4970.1 3117.4,4970.1 3136.9,4970.1 3202.3,4904.7 3545.4,4904.7 ; U1.11@3708.1,3911 3669.4,3911 3608.5,3911 3591.3,3928.2 3580.3,3928.2 3567.9,3940.6 3567.9,3951.5 3560.4,3959 3543.3,3959 3511.9,3990.4 3494.6,3990.4 3475.1,4009.9 3475.1,4030.3 3419.7,4085.7 3419.7,4127.3 3514.4,4222 3547.1,4222 3582.5,4257.4 3582.5,4337.5 3545.4,4374.6 3545.4,4904.7 ; U4.1@3977.8,4970.1 U4.1@3977.3,4970.1 ; U6.1@5380.1,4662.2 5204.8,4662.2 4896.9,4970.1 4877.4,4970.1 U5.1@4857.8,4970.1 4818.7,4970.1 4775,5013.8 4666.2,5013.8 4623.5,4971.1 4623.5,4960.4 4573.7,4910.6 4519.6,4910.6 4513.6,4904.6 4042.8,4904.6 U4.1@3977.3,4970.1 ; 3545.4,4904.7 3692.3,4904.7 3747.8,4960.2 3747.8,4975.4 3782.6,5010.2 3898.6,5010.2 3938.7,4970.1 3958.3,4970.1 3976.9,4970.1 U4.1@3977.3,4970.1
NRST: C22.2 D5.1 EXP2.8 R19.1 SW1.1 SW1.3 SWD.5 U1.7 | length 3086.5
  Top Layer w6: SW1.1@3625.9,4473.3 SW1.1@3651.2,4473.3 ; SW1.3@3626,4650.6 SW1.3@3651.3,4650.6 ; v2(3660.3,3983.9) 3666.4,3990 U1.7@3708.1,3990 ; v2(4045.9,4480) 4055.2,4480 R19.1@4083.95,4480 R19.1@4084,4495.4 ; C22.2@4076.95,4560 C22.2@4077,4563.9
  Top Layer w32: SW1.1@3651.2,4473.3 3651.3,4473.4 3651.3,4650.6 3661.9,4640 4076,4640 4076,4560.9 C22.2@4076.95,4560 4077,4487 R19.1@4083.95,4480
  Bottom Layer w6: v2(3660.3,3983.9) 3821.5,3822.8 ; EXP2.8@3677.6,3049.3 3720,3080 3720,3112.2 3720,3721.3 3821.5,3822.8 ; v2(4045.9,4480) 4045.9,4039.8 ; SWD.5@4360,3980 4300.2,4039.8 4045.9,4039.8 ; 3821.5,3822.8 3828.8,3822.8 4045.9,4039.8
R7_1: Q5.1 R7.1 | length 136.1
  Top Layer w32: Q5.1@2968,3229.9 3065.2,3229.9 3065.2,3230 R7.1@3103.95,3230
R10_1: Q1.1 R10.1 | length 116.1
  Top Layer w32: Q1.1@2978,3759.9 3065.2,3759.9 3065.2,3760 R10.1@3093.95,3760
R12_1: Q3.1 R12.1 | length 116.1
  Top Layer w32: Q3.1@2978,4289.9 3065.2,4289.9 3065.2,4290 R12.1@3093.95,4290
R18_2: R18.2 R25.2 USB1.3 | length 490
  Top Layer w6: R25.2@4980,2590.9 5070,2590.9 5070,2562.2 5197.8,2562.2 USB1.3@5370,2390
R20_1: Q2.1 R20.1 | length 126.1
  Top Layer w32: Q2.1@2968,2699.9 3065.2,2699.9 3065.2,2700 R20.1@3093.95,2700
R21_2: BOOT0.2 R21.2 | length 603.7
  Top Layer w6: R21.2@3929.1,4300 3957.8,4300 3967.9,4300 3989.1,4321.2 4119.9,4321.2 v2(4160.8,4362.2)
  Bottom Layer w6: v2(4160.8,4362.2) 4160.8,4440.8 BOOT0.2@4350,4630
R22_2: R22.2 USB1.2 | length 215.2
  Top Layer w6: R22.2@5229.1,2630 5257.8,2630 5257.8,2602.2 USB1.2@5370,2490
RX: U1.43 UART.4 | length 801.2
  Top Layer w6: U1.43@4172.1,4009 4229.6,4009 4340.2,3898.4 v2(4539.5,3898.4)
  Bottom Layer w6: UART.4@4500,4270 4539.5,4230.5 v2(4539.5,3898.4)
S$15: 
S$17: 
S$18: 
S$20: 
S$31: 
S$33: 
S$54: 
S$56: 
S$58: 
S$60: 
S$62: 
S$64: 
S$66: 
S$67: 
S$68: 
S$69: 
S$150: 
S$152: 
S$236: 
S$240: 
S$142391: 
S$142464: 
S$142611: 
S$142846: 
S$142932: 
S$142938: 
S$142941: 
S$143081: 
S$143083: 
S$143105: 
S$143107: 
S$143155: 
S$143157: 
S$143161: 
S$143234: 
S$143360: 
S$143362: 
S$143364: 
S$143366: 
S$143368: 
S$143370: 
SCL: I2C.3 R28.1 U1.29 | length 680.2
  Top Layer w6: U1.29@4029,3727.9 4029,3689.3 4029,3331.1 4051.3,3308.7 4128.7,3308.7 I2C.3@4170,3350 4170,3460 R28.1@4163.95,3460
SD_DET: EXP2.7 J1.9 R30.1 U1.51 | length 2762.8
  Top Layer w6: v2(3618.7,3251.9) 3677.6,3193 EXP2.7@3677.6,3149.3 3730,3090 3730,2940 3809.7,2870.3 4250.5,2869.5 4256,2863.7 4301.1,2863.7 4534,2630.8 R30.1@4533.95,2600 4534,2537.6 4542,2529.6 J1.9@4542,2489 ; v2(4004,4244.3) 4034.3,4244.3 4048,4230.6 U1.51@4048,4191.9
  Bottom Layer w6: v2(3618.7,3251.9) 3618.7,3997.2 3694.4,4072.9 3851.6,4072.9 4004,4225.3 v2(4004,4244.3)
SD_SEL: EXP2.4 J1.2 R23.2 U1.20 | length 2084.3
  Top Layer w6: U1.20@3851,3727.9 3851,3689.3 3861,3679.3 3861,3585.2 3790.5,3514.7 3790.5,3278 3830,3238.5 3830,3090 3874.1,3045.9 3898.8,3070.6 ; v2(3970,2900) 4241.9,2900 4266.1,2875.8 4307.9,2875.8 4552.9,2630.8 4772.6,2630.8 R23.2@4803.4,2600 ; R23.2@4789.1,2600 R23.2@4803.4,2600 ; J1.2@4845,2489 4845,2572.8 4817.8,2600 R23.2@4803.4,2600
  Bottom Layer w6: EXP2.4@3877.6,3049.3 3879.1,3050.9 3970,2960 v2(3970,2900)
SDA: I2C.4 R27.1 U1.30 | length 712.9
  Top Layer w6: U1.30@4048,3727.9 4048,3766.6 4102,3766.6 4190.8,3677.8 4190.8,3557.9 4270,3478.7 I2C.4@4270,3350
  Top Layer w32: I2C.4@4270,3350 4280,3350 R27.1@4280,3226.05